# Altium PCB TNY276 DEMO1.PcbDoc
Units mm, origin at the board's own origin, x right, y up, seen from the top; angles counter-clockwise.
Board outline 61.9 x 40.18 mm, 2 copper layers (Top Layer, Bottom Layer); 21 components, 15 nets, 59 pads, 1 vias.
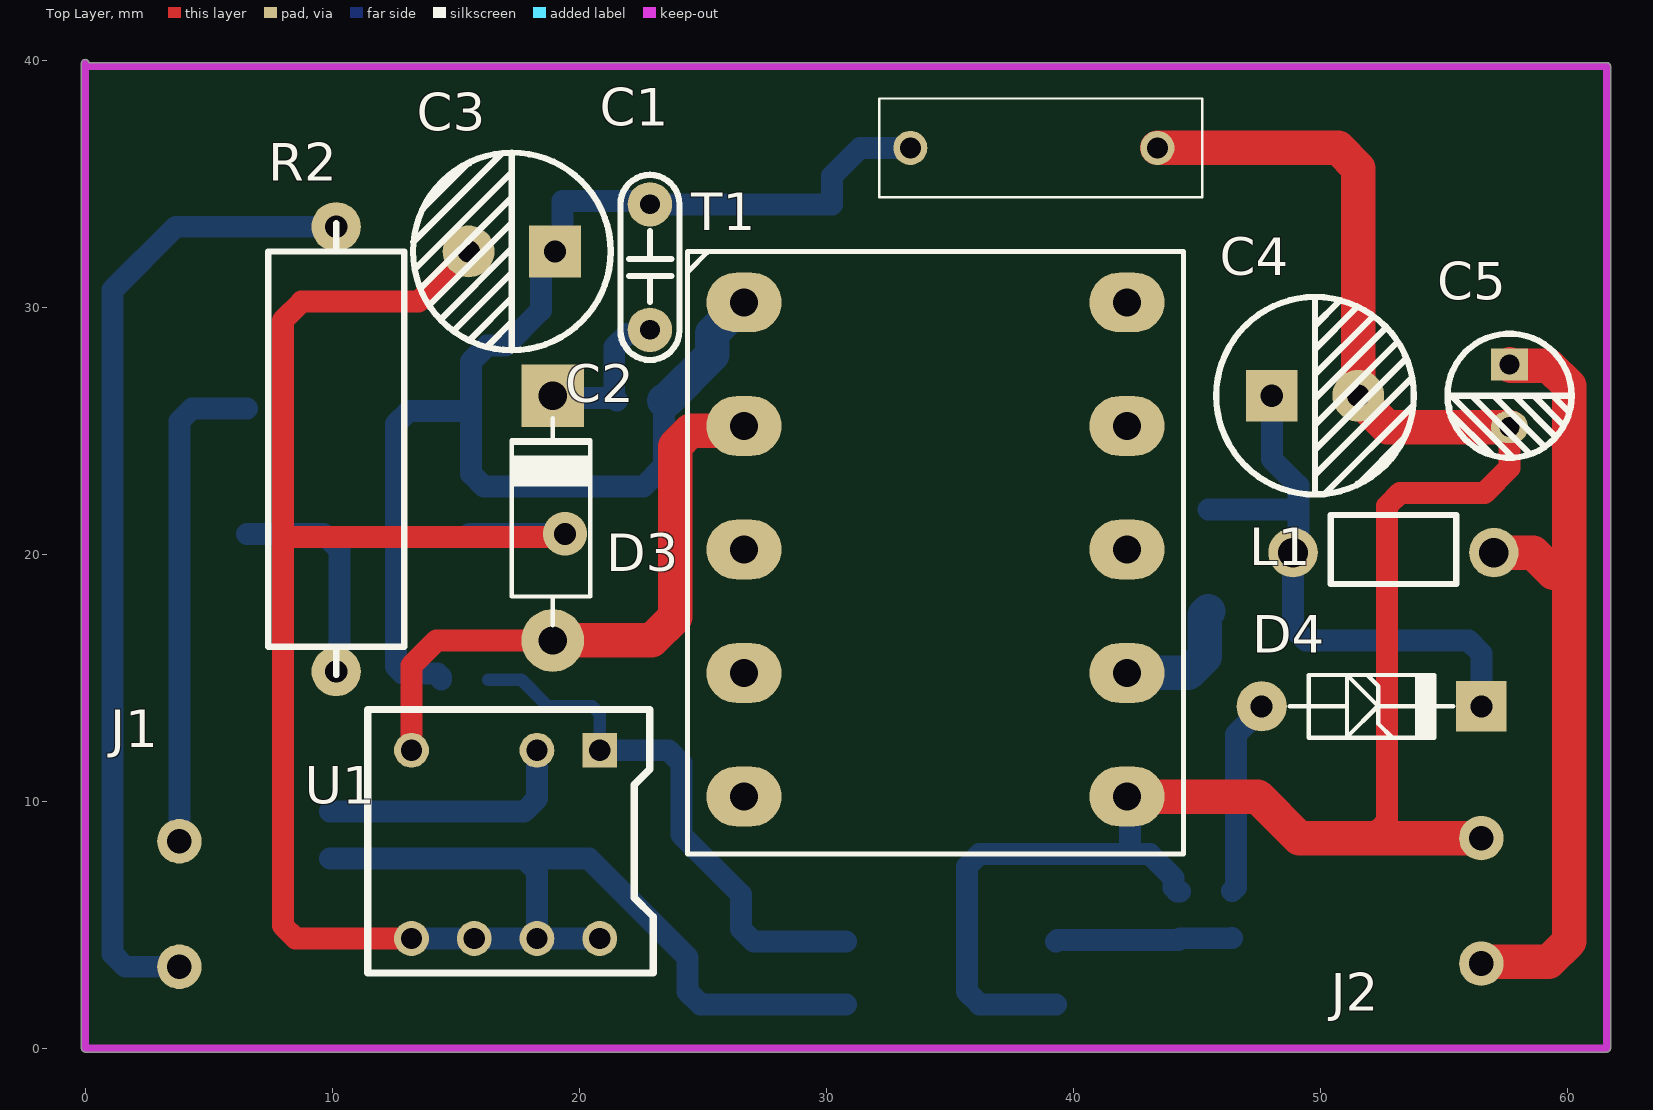
[diagram p0: Top Layer view]
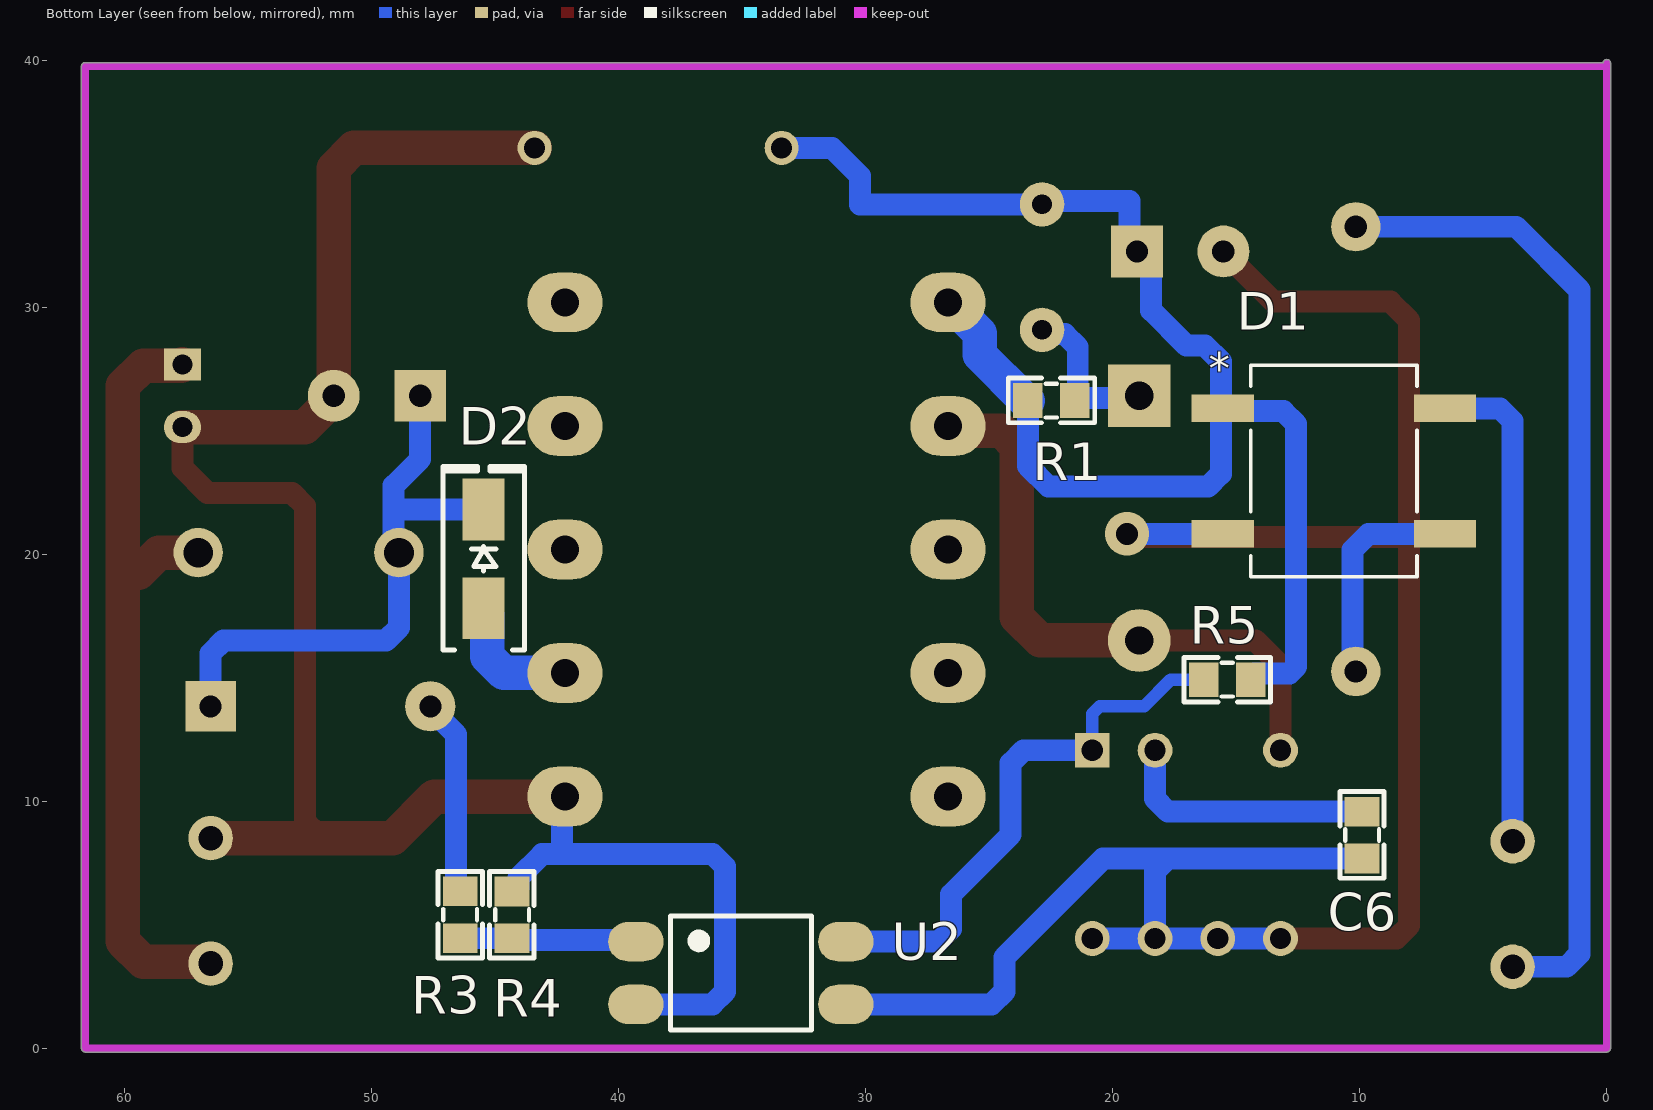
[diagram p1: Bottom Layer view, seen from below]
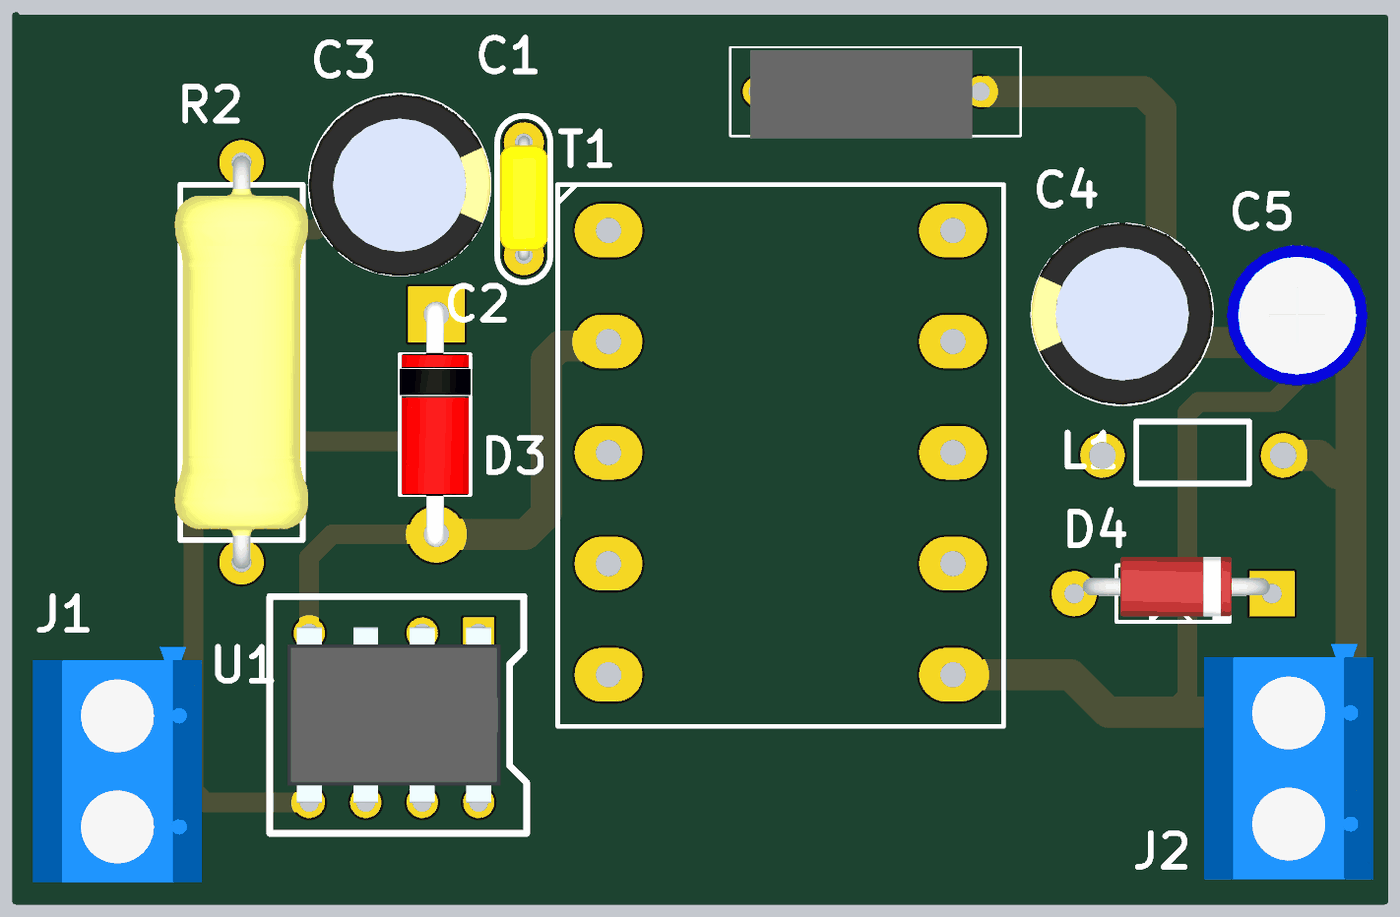
[diagram p2: 3D render of the assembled board from above, using the file's embedded part models]
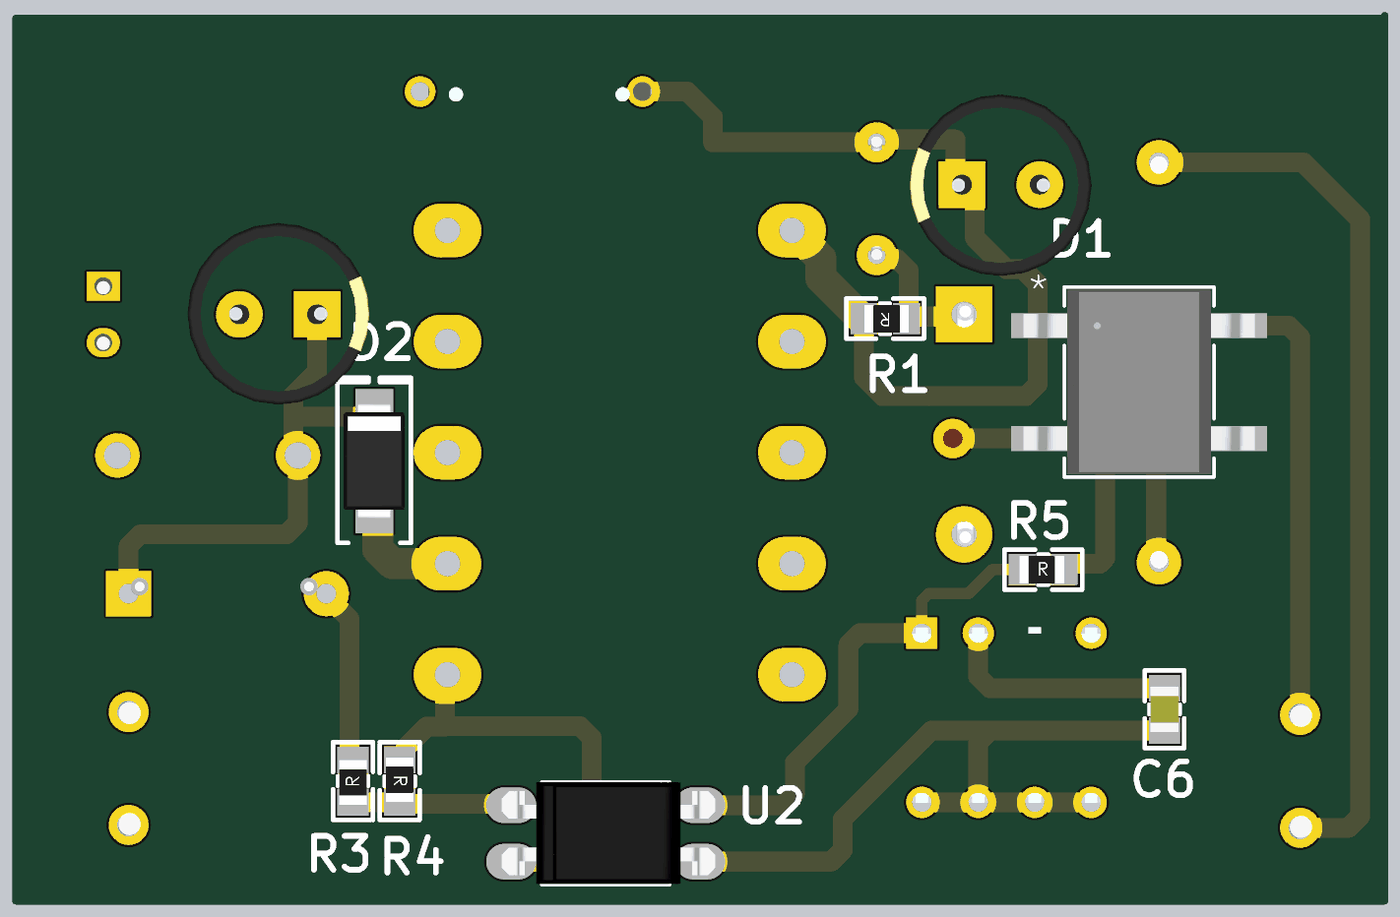
[diagram p3: 3D render of the assembled board from below, using the file's embedded part models]

## Layer stack, top to bottom
Top Solder: solder mask 0.0254, SM-001, Dk 4
Top Layer: signal copper 0.0356
Dielectric 1: dielectric 0.32, FR-4, Dk 4.8
Bottom Layer: signal copper 0.0356
Bottom Solder: solder mask 0.0254, SM-001, Dk 4

## Board outline
0,-0.15 cw(c0,0) -0.15,0 -0.15,39.878 cw(c0,39.878) 0.149,39.901 61.595,39.901 cw(c61.595,39.751) 61.745,39.751 61.745,0 cw(c61.595,0) 61.595,-0.15

## Design rules (kind name [scope] priority, off if disabled: settings)
Clearance [All] p1: gap=0.508 ignorepadtopadclearanceinfootprint=FALSE
PolygonConnect [All] p1: connectstyle=Direct reliefconductorwidth=0.254 reliefentries=4 polygonreliefangle="90 Angle" airgapwidth=0.254
RoutingVias [All] p1: holewidth=0.711 width=1.27 viastyle="Through Hole" minholewidth=0.711 minwidth=1.27 maxholewidth=0.889 maxwidth=1.778
SolderMaskExpansion [All] p1: expansion=0.102 istentingtop=FALSE
Width [All] p1: maxlimit=1.397 minlimit=0.508 preferedwidth=0.889
30 further rules are at their usual default settings.

## Components (designator, comment, footprint, x,y, rotation, side; value= is the part's Value field where it differs from the comment)
C1 "1nF" "Tenta capacitor" 33.401,36.449 r0 top
C2 "1nF/400v" "tu tantalum dip5.08" 22.86,31.623 r270 top
C3 "4.7uF" "tu hoa 8mm" 17.272,32.258 r180 top
C4 "470uF" "tu hoa 8mm" 49.784,26.416 r0 top
C5 "100uF" "tu hoa 5mm" 57.658,26.416 r270 top
C6 "104" "tu 0805" 9.906,8.636 r270 bottom
D1 "Diode bridge" DS207S 11.049,23.368 r180 bottom
D2 "SS16" "DIODE SMA" 45.466,19.812 r90 bottom
D3 "FR107" "DIODE 2A" 18.923,27.051 r270 top
D4 "15V" DZ1A 47.625,13.843 r180 top value=3v3
J1 "Domino" Domino 3.81,3.302 r90 top
J2 "Domino" Domino 56.515,3.429 r90 top
L1 "Ferrit Bead" "CUON CAM" 52.959,20.066 r0 top
R1 "47k" "tro smd 0805" 22.479,26.162 r0 bottom
R2 "10R/1W" "tro vach 1w" 10.16,24.257 r270 top
R3 "390" "tro smd 0805" 46.482,5.404 r90 bottom
R4 "2k" "tro smd 0805" 44.257,5.404 r270 bottom
R5 "4M" "tro smd 0805" 15.367,14.986 r180 bottom
T1 "EE25" EE25_0.5 34.29,20.573 r0 top
U1 "TNY276" PCBComponent_1 17.272,8.382 r270 top
U2 "OPTO PC817 SMD" SOP4 35.052,3.048 r180 bottom value=PC817

## Footprints (in the part's own frame and the unit in brackets; to place one, negate y for a bottom-side part, rotate by r counter-clockwise, add the part's x,y. Pads: shape width x height; smd on the part's side, far side on the other; paste and mask are expansions set on the pad)
"CUON CAM" [mm] "Dang cam giong tro"
  round 2 hole 1.2: 1(-4.064,0) 2(4.064,0)
  silkscreen extent -2.54,-1.27 2.54,1.52
"DIODE 2A" [mil] "Diode 2A"
  round 100 hole 45: 1(415,0)
  rect 100x100 hole 45: 2(25,0)
  silkscreen extent 61,-65 391,60, body extent 4,-65 436,61, height 113
"DIODE SMA" [mm] "SMA"
  rect 2.5x1.7 smd: 1(-2,0) 2(2,0)
  silkscreen extent -3.68,-1.65 3.75,1.65, body extent -2.6,-1.37 2.6,1.37, height 2.4
Domino [mm]
  round 1.8 hole 1: 1(0,0) 2(5.08,0)
  body extent -2.46,-4.56 8.14,3.04, height 10
DS207S [mm]
  rect 2.518x1.117 smd paste+0 mask+0: 1(-4.498,2.54) 2(-4.498,-2.54) 3(4.498,-2.54) 4(4.498,2.54)
  silkscreen extent -3.37,-4.28 3.37,4.28, body extent -5.21,-4.15 5.21,4.15, height 3.63
DZ1A [mil] "Diode 1A, W 100mil, L 350mil"
  round 80 hole 35: 1(0,0)
  rect 80x80 hole 35: 2(-350,0)
  silkscreen extent -305,-50 -45,50, body extent -346,-65 -15,40, height 121
EE25_0.5 [mil]
  oval 120x95 hole 45: 1(-300,378.72) 2(-300,181.87) 3(-300,-14.98) 4(-300,-211.83) 5(-300,-408.68) 6(310.24,-408.68) 7(310.24,-211.83) 8(310.24,-14.98) 9(310.24,181.87) 10(310.24,378.72)
  silkscreen extent -390,-500 400,460
PCBComponent_1 [mm]
  rect 1.41x1.41 hole 0.86: 1(-3.683,3.556)
  round 1.41 hole 0.86: 2(-3.683,1.016) 4(-3.683,-4.064) 5(3.937,-4.064) 6(3.937,-1.524) 7(3.937,1.016) 8(3.937,3.556)
  silkscreen extent -5.33,-5.84 5.33,5.72, body extent -3.95,-5.04 3.95,4.53, height 4.06
SOP4 [mm]
  oval 2.25x1.6 smd: 1(-4.25,1.27) 2(-4.25,-1.27) 3(4.25,-1.27) 4(4.25,1.27)
  silkscreen extent -2.85,-2.3 2.85,2.3, body extent -4.67,-2.29 4.93,2.31, height 3.6
"Tenta capacitor" [mm]
  round 1.381 hole 0.85: 1(0,0) 2(10,0)
  silkscreen extent -1.25,-2 11.81,2, body extent -9.11,-3.5 10.89,3.25, height 5.8
"tro smd 0805" [mm]
  rect 1.2x1.4 smd: 1(-0.946,-0.061) 2(0.954,-0.061)
  silkscreen extent -1.75,-0.97 1.75,0.84, body extent -1.56,-0.76 1.44,0.64, height 0.53
"tro vach 1w" [mm]
  round 2 hole 0.9: 1(-9,0) 2(9,0)
  silkscreen extent -9.14,-2.75 9.14,2.75, body extent -9.29,-3 9.29,3, height 6.5
"tu 0805" [mm] "Compoment SMD 80x50mil"
  rect 1.2x1.4 smd: 1(-0.946,-0.003) 2(0.954,-0.003)
  silkscreen extent -1.75,-0.89 1.75,0.89, body extent -1.01,-0.64 1.01,0.63, height 0.61
"tu hoa 5mm" [mm]
  rect 1.3x1.5 hole 0.8: 1(-1.27,0)
  oval 1.3x1.5 hole 0.8: 2(1.27,0)
  silkscreen extent -2.51,-2.51 2.51,2.51, body extent -3.12,-3.18 3.23,3.18, height 14.55
"tu hoa 8mm" [mm]
  rect 2.1x2.1 hole 0.9: 1(-1.75,0)
  round 2.1 hole 0.9: 2(1.75,0)
  silkscreen extent -4,-4 4,4, body extent -4.1,-4.07 4.1,4.13, height 13.81
"tu tantalum dip5.08" [mm]
  round 1.8 hole 0.8: 1(-2.54,0) 2(2.54,0)
  silkscreen extent -3.74,-1.2 3.76,1.2, body extent -2.82,-1.08 2.77,1.08, height 6.27

## Part data
C1: library part "Tenta capacitor", "...nF +/-10% 275VAC 15 Through Hole Suppression Capacitors", Manufacturer_Name=Tenta, Manufacturer_Part_Number=MEX104K275A, Datasheet Link=https://datasheet.lcsc.com/szlcsc/1811021609_TENTA-ELEC-INDUSTRIAL-MEX104K275A41_C8971.pdf, Geometry.Height=9.5mm
C2: library part "Tu tantalum 10nF DIP5.08", "tụ cao áp Cắm", Chung_Loai=Cắm, Don_Vi=Con, Ma_Hang=MH002105, So_Chan=2, Ten_Linh_Kien="Tụ tantalum 103-10nF DIP5.08 (sứ vàng)(10PCS)"
C3: library part "Tu Hoa 4.7uF 400V 8x12", "Cắm", Chung_Loai=Cắm, Don_Vi=Con, Ma_Hang=MH003744, So_Chan=2, Ten_Linh_Kien="Tụ Hóa 4.7uF 400V 8x12MM"
C4: library part "Tu Hoa 470uF 25V 8x13", "Cắm", Chung_Loai=Cắm, Don_Vi=Con, Ma_Hang="MH 470uF 25V", So_Chan=2, Ten_Linh_Kien="Tụ Hóa 470uF 25V"
C5: library part "Tu Hoa 100uF 25V 6x11", "Cắm", Chung_Loai=Cắm, Don_Vi=Con, Ma_Hang=MH001351, So_Chan=2, Ten_Linh_Kien="Tụ Hóa 100uF 25V 6x11MM"
C6: library part "Tu 0805 104 50V 10%", "Dán", Chung_Loai=Dán, Don_Vi=Con, Ma_Hang=MH004551, So_Chan=2, Ten_Linh_Kien="Tụ 0805 104-100nF 10% 50V"
D1: library part DS207S, "Diode cau 2A 1000V"
D2: library part "Diode SS14 ( 1N5819)", "Dán", Chung_Loai=Dán, Don_Vi=Con, Ma_Hang=MH002211, Ten_Linh_Kien="Diode SS14 DO214 Schottky 1A 40V ( 1N5819 DO214)"
D3: library part "Diode FR207", "Cắm", Chung_Loai=Cắm, Don_Vi=Con, Ma_Hang=MH005704, Ten_Linh_Kien="Diode FR207 2A 1000V ( DIP)"
D4: library part DZ, "Diode Zenner"
J1 J2: "Domino 5.04mm"
L1: library part "CUON CAM 470uH DIP", "Cuộn lọc RH3.5x9x0.8 Cắm", Chung_Loai=Cắm, Don_Vi=Con, Ma_Hang=MH002232, Ten_Linh_Kien="Cuộn Cảm 470uH 3A 8x10MM"
R1 R5: library part "Tro 0805 5% 47k", "Dán", Chung_Loai=Dán, Don_Vi=Con, Ma_Hang=MH005320, So_Chan=2, Ten_Linh_Kien="Trở 0805 5% 47k"
R2: library part "Tro Vach 1W 5% 3.3R", "Cắm", Chung_Loai=Cắm, Don_Vi=Con, Ma_Hang=MH008003, So_Chan=2, Ten_Linh_Kien="Trở 5% 1w 3.3R"
R3: library part "Tro 0805 5% 2.2k", "Dán", Chung_Loai=Dán, Don_Vi=Con, Ma_Hang=MH005237, So_Chan=2, Ten_Linh_Kien="Trở 0805 5% 2.2k"
R4: library part "Tro 0805 5% 220R", "Dán", Chung_Loai=Dán, Don_Vi=Con, Ma_Hang=MH005259, So_Chan=2, Ten_Linh_Kien="Trở 0805 5% 220R"
T1: "EE25 10PIN"
U1: "TNY274-280 / TinySwitch-III Family - DIP/PDIP-8C"
U2: "Single Opto"

## Via types
v1: diameter 1.778, hole 0.889, Top Layer to Bottom Layer, 1 vias

## Nets (pads, with @x,y where several pads share a name; then routed paths per layer and width w, separated by ;. In a path a pad name is that pad's centre, name@x,y a point inside that pad or via, vN(x,y) a via of type N, cw(c..) or ccw(c..) an arc to the next point about the centre after c; other vN are vias at no path point)
16V: C5.1 J2.1 L1.2 | length 31.9
  Top Layer w1.397: J2.1 56.592,3.506 59.253,3.506 60.071,4.324 60.071,26.819 59.253,27.638 57.706,27.638 C5.1 ; L1.2 58.618,20.066 59.436,19.248
AC1: D1.4 J1.2 | length 20
  Bottom Layer w0.889: J1.2 3.81,25.387 4.331,25.908 D1.4
AC2: J1.1 R2.1 | length 39.9
  Bottom Layer w0.889: J1.1 1.623,3.302 1.102,3.823 1.102,30.693 3.666,33.257 R2.1
BP/M: C6.1 U1.2 | length 10.6
  Bottom Layer w0.889: C6.1 17.767,9.582 18.288,10.102 U1.2
D: D3.1 T1.2 U1.4 | length 25.3
  Top Layer w0.889: U1.4 13.208,15.494 14.224,16.51 D3.1
  Top Layer w1.397: D3.1 22.931,16.51 23.876,17.455 23.876,24.375 24.5,24.999 26.476,24.999 T1.2
  Bottom Layer w1.397: D3.1 19.05,16.383 D3.1@19.177,16.51
EN/UV: R5.1 U1.1 U2.4 | length 22.3
  Bottom Layer w0.508: R5.1 17.651,14.925 18.733,13.843 20.53,13.843 20.828,13.545 U1.1
  Bottom Layer w0.889: U1.1 23.609,12.065 24.13,11.544 24.13,8.649 26.543,6.236 26.543,4.839 27.064,4.318 U2.4
GND: C3.2 C6.2 D1.2 U1.5 U1.6 U1.7 U1.8 U2.3 | length 89.2
  Top Layer w0.889: U1.5 8.522,4.445 8.001,4.966 8.001,20.701 ; C3.2 13.49,30.226 8.763,30.226 8.001,29.464 8.001,20.701 ; v1(19.431,20.828) 19.304,20.701 8.001,20.701
  Bottom Layer w0.889: C6.2 17.767,7.682 ; U1.5 U1.6 U1.7 ; D1.2 v1(19.431,20.828) ; U1.8 U1.7 ; U2.3 24.905,1.778 24.384,2.299 24.384,3.683 20.385,7.682 17.767,7.682 ; 17.767,7.682 18.288,7.161 U1.7
MASS: C1.2 C4.2 C5.2 J2.2 R4.1 T1.6 U2.2 | length 80.9
  Top Layer w0.889: 52.36,8.854 52.705,9.199 52.705,21.958 53.226,22.479 56.642,22.479 57.658,23.495 C5.2
  Top Layer w1.397: T1.6 47.465,10.193 49.149,8.509 J2.2 ; C1.2 50.716,36.449 51.534,35.631 C4.2 51.534,26.316 52.704,25.146 C5.2
  Bottom Layer w0.889: U2.2 36.208,1.778 35.687,2.299 35.687,7.353 36.208,7.874 42.291,7.874 ; T1.6 42.291,10.072 42.291,7.858 43.098,7.858 44.062,6.893 44.062,6.506 44.218,6.35 R4.1
NetC1_1: C1.1 C2.1 C3.1 D1.1 R1.2 R5.2 T1.1 | length 60.4
  Bottom Layer w0.889: R5.2 14.413,15.025 14.257,15.181 12.838,15.181 12.573,15.446 12.573,25.273 13.094,25.794 15.433,25.794 D1.1 ; R1.2 23.433,23.573 22.593,22.733 16.142,22.733 15.621,23.254 15.621,25.834 D1.1 ; C1.1 31.369,36.449 30.226,35.306 30.226,34.163 C2.1 22.733,34.29 19.317,34.29 19.317,32.553 C3.1 18.444,31.681 18.444,29.874 17.018,28.448 16.269,28.448 15.621,27.8 15.621,25.982 D1.1
  Bottom Layer w1.397: R1.2 23.53,26.223 25.375,28.067 25.375,28.94 26.627,30.193 T1.1
NetC2_2: C2.2 D3.2 R1.1 | length 6.5
  Bottom Layer w0.889: D3.2 19.02,26.319 R1.1@21.437,26.319 ; R1.1 R1.1@21.437,26.319 ; C2.2 22.686,28.909 21.936,28.909 21.416,28.388 21.416,26.341 R1.1@21.437,26.319
NetC4_1: C4.1 D2.2 D4.2 L1.1 | length 23.8
  Bottom Layer w0.889: D2.2 49.076,21.812 49.108,21.844 ; C4.1 48.034,23.848 49.108,22.774 49.108,21.844 ; D4.2 56.515,15.989 55.994,16.51 49.416,16.51 48.895,17.031 L1.1 49.108,20.279 49.108,21.844
NetD1_3: D1.3 R2.2 | length 9.2
  Bottom Layer w0.889: D1.3 9.639,20.828 10.287,20.18 10.287,15.384 R2.2 R2.2@10.016,15.113
NetD2_1: D2.1 T1.7 | length 5.4
  Bottom Layer w0.889: D2.1@45.466,17.697 D2.1
  Bottom Layer w1.397: T1.7 44.648,15.193 45.314,15.86 45.314,17.545 D2.1@45.466,17.697
NetD4_1: D4.1 R3.2 | length 8
  Bottom Layer w0.889: R3.2 46.423,6.359 46.579,6.514 46.579,12.7 47.625,13.746 D4.1
NetR3_1: R3.1 R4.2 U2.1 | length 7.2
  Bottom Layer w0.889: U2.1 39.368,4.384 44.252,4.384 R4.2 44.322,4.454 46.417,4.454 R3.1
pads on no net: T1.3 T1.4 T1.5 T1.8 T1.9 T1.10

## Keep-outs
Keep-Out Layer:
  lines w0.3: 0,39.878 0,0 61.595,0 61.595,39.751 0.127,39.751

## Text inside footprints (layer, text, board x,y; h text height)
D1: Bottom Overlay "*" at 16.118,26.898 h1.27; Mechanical 13 "*" at 14.224,26.175 h1.27